# EAGLE board controller01_sliderboard (EAGLE 9.6.2)
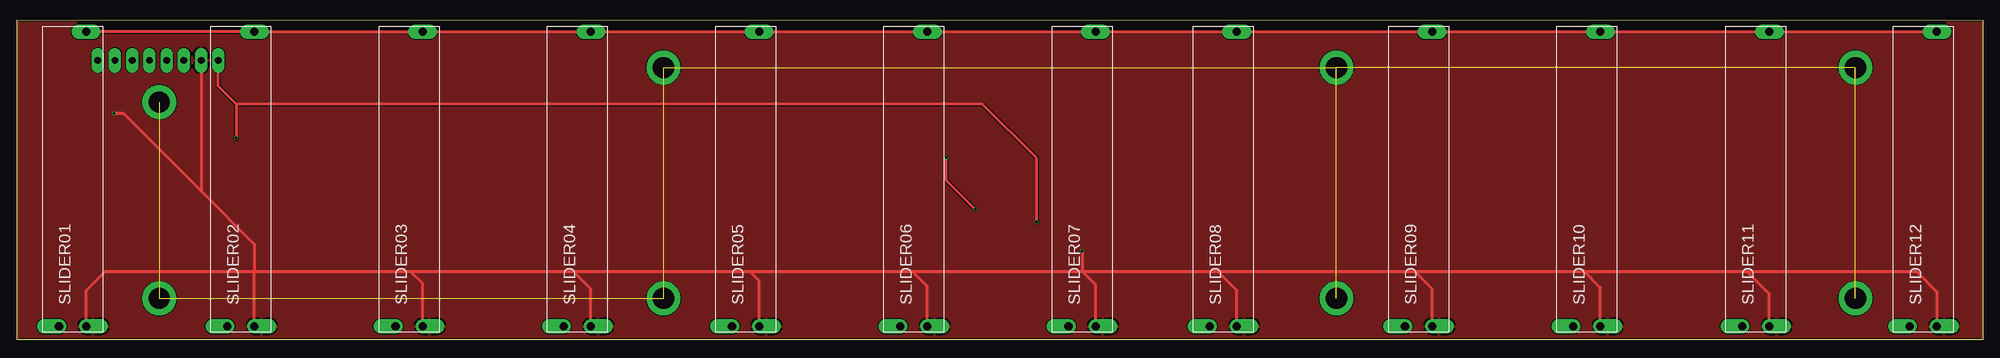
[diagram p0: board, top side]
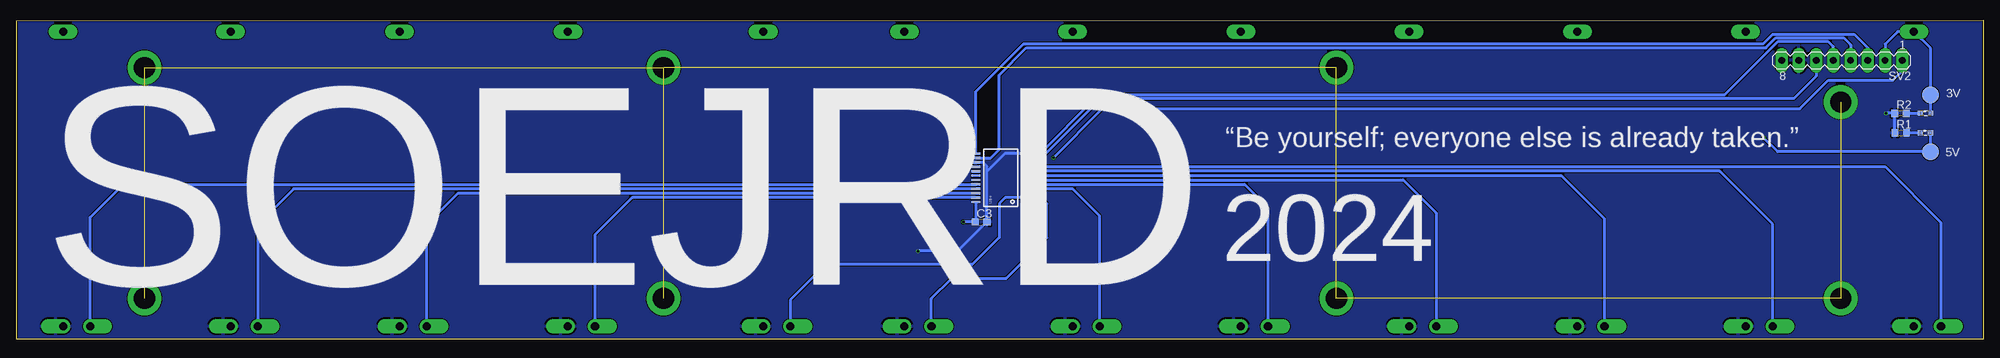
[diagram p1: board, bottom side, seen from below]

Size 289.8 x 47.1 mm. Coordinates in mm from the lower left corner, seen from the top.
Outline: 0,0 289.8,0 289.8,47 0,47.1 0,0
Copper layers (1*16): Top 0.035mm / dielectric 1.6mm / Bottom 0.035mm
Design rules "jlcpcb-2layers": minimum track width 5mil, minimum drill 0.3mm, track to track 5mil, track to pad 5mil, pad to pad 5mil, via to via 5mil, smd to smd 5mil, copper to edge 0.2mm, drill to drill 6mil, minimum pad ring 10mil, minimum via ring 3mil, stop-mask expansion 4mil, vias tented up to drill 0mil, thermal gap 10mil

## Footprints (pad centres in the part's own frame; a part is rotated, then mirrored left to right if it is on the bottom)
SML0603 = smd 0.8 x 0.8: A 0.75,0; C -0.75,0
C0603 = smd 1.1 x 1: 1 -0.85,0; 2 0.85,0
R0603 = smd 1 x 1.1: 1 -0.85,0; 2 0.85,0
SC-302N = drill 1.2 offset: P$1 0.8,-6.5; P$2 0.8,-2.5 | drill 1.2 long: P$3 44.3,-6.5
MA08-1 = drill 1.016 long: 1 -8.89,0; 2 -6.35,0; 3 -3.81,0; 4 -1.27,0; 5 1.27,0; 6 3.81,0; 7 6.35,0; 8 8.89,0
B2,54 = smd 2.54 x 2.54: TP 0,0
SSOP24 = smd 0.348 x 1.397: 1 -3.575,-3.656; 2 -2.925,-3.656; 3 -2.275,-3.656; 4 -1.625,-3.656; 5 -0.975,-3.656; 6 -0.325,-3.656; 7 0.325,-3.656; 8 0.975,-3.656; 9 1.625,-3.656; 10 2.275,-3.656; 11 2.925,-3.656; 12 3.575,-3.656; 13 3.575,3.656; 14 2.925,3.656; 15 2.275,3.656; 16 1.625,3.656; 17 0.975,3.656; 18 0.325,3.656; 19 -0.325,3.656; 20 -0.975,3.656; 21 -1.625,3.656; 22 -2.275,3.656; 23 -2.925,3.656; 24 -3.575,3.656

## Placement (x,y rotation side)
3V  [SML0603]  8.46,33.37 0 bottom
5V  [SML0603]  8.47,30.47 0 bottom
C3  100n  [C0603]  147.7,17.28 0 bottom
R1  1k  [R0603]  12.14,30.44 0 bottom
R2  1k  [R0603]  12.15,33.34 0 bottom
SLIDER01  SC-302N  [SC-302N]  3.7,1.1 90 top
SLIDER02  SC-302N  [SC-302N]  28.5,1.1 90 top
SLIDER03  SC-302N  [SC-302N]  53.3,1.1 90 top
SLIDER04  SC-302N  [SC-302N]  78.1,1.1 90 top
SLIDER05  SC-302N  [SC-302N]  102.9,1.1 90 top
SLIDER06  SC-302N  [SC-302N]  127.7,1.1 90 top
SLIDER07  SC-302N  [SC-302N]  152.5,1.1 90 top
SLIDER08  SC-302N  [SC-302N]  173.3,1.1 90 top
SLIDER09  SC-302N  [SC-302N]  202.1,1.1 90 top
SLIDER10  SC-302N  [SC-302N]  226.9,1.1 90 top
SLIDER11  SC-302N  [SC-302N]  251.8,1.1 90 top
SLIDER12  SC-302N  [SC-302N]  276.5,1.1 90 top
SV2  [MA08-1]  20.8,41.15 180 bottom
TP_5V  TPB2,54  [B2,54]  7.75,27.68 0 bottom
TV_3V3  TPB2,54  [B2,54]  7.73,36.08 0 bottom
U$4  MUX-74HC4067SMD  [SSOP24]  144.82,23.82 90 bottom

## Library data of the parts
3V 5V = led
C3 = rcl
R1 R2 = rcl; SPICEPREFIX: R
SLIDER01-SLIDER09 SLIDER10-SLIDER12 = Soejrd
SV2 = con-lstb; OC_FARNELL: unknown; OC_NEWARK: unknown
TP_5V TV_3V3 = testpad
U$4 = SparkFun-AnalogIC

## Nets
+3V3_A: 3V.A SLIDER01.P$3 SLIDER02.P$3 SLIDER03.P$3 SLIDER04.P$3 SLIDER05.P$3 SLIDER06.P$3 SLIDER07.P$3 SLIDER08.P$3 SLIDER09.P$3 SLIDER10.P$3 SLIDER11.P$3 SLIDER12.P$3 SV2.2 TV_3V3.TP
+5V: 5V.A C3.1 SV2.8 TP_5V.TP U$4.24
COM5: SV2.1 U$4.1
GND: C3.2 R1.1 R2.1 SLIDER01.P$1 SLIDER02.P$1 SLIDER03.P$1 SLIDER04.P$1 SLIDER05.P$1 SLIDER06.P$1 SLIDER07.P$1 SLIDER08.P$1 SLIDER09.P$1 SLIDER10.P$1 SLIDER11.P$1 SLIDER12.P$1 SV2.7 U$4.12 U$4.15
N$1: 5V.C R1.2
N$2: 3V.C R2.2
S0: SV2.6 U$4.10
S1: SV2.5 U$4.11
S2: SV2.4 U$4.14
S3: SV2.3 U$4.13
SLIDER01: SLIDER01.P$2 U$4.9
SLIDER02: SLIDER02.P$2 U$4.8
SLIDER03: SLIDER03.P$2 U$4.7
SLIDER04: SLIDER04.P$2 U$4.6
SLIDER05: SLIDER05.P$2 U$4.5
SLIDER06: SLIDER06.P$2 U$4.4
SLIDER07: SLIDER07.P$2 U$4.3
SLIDER08: SLIDER08.P$2 U$4.2
SLIDER09: SLIDER09.P$2 U$4.23
SLIDER10: SLIDER10.P$2 U$4.22
SLIDER11: SLIDER11.P$2 U$4.21
SLIDER12: SLIDER12.P$2 U$4.20

## Tracks (layer width: path | path; a pad name or v marks a point on that pad's centre or on a via)
+3V3_A
  Top 0.406: SLIDER12.P$3 SLIDER11.P$3 SLIDER10.P$3 SLIDER09.P$3 SLIDER08.P$3 SLIDER07.P$3 SLIDER06.P$3 SLIDER05.P$3 SLIDER04.P$3 SLIDER03.P$3 SLIDER02.P$3 SLIDER01.P$3
  Bottom 0.406: SV2.2 14.45,43.55 12.6,45.4 SLIDER01.P$3 7.73,42.93 TV_3V3.TP 7.71,36.06 3V.A
+5V  (via drill 0.35)
  Top 0.406: v150.3,17.3 150.3,26.7 142.3,34.7 32.3,34.7 | SV2.8 29.69,37.31 32.3,34.7 | 32.3,34.7 v32.3,29.7
  Bottom 0.406: U$4.24 148.48,17.35 C3.1 150.28,17.28 v150.3,17.3 | 5V.A 7.75,30.44 TP_5V.TP 30.28,27.68 v32.3,29.7
COM5  (via drill 0.35)
  Top 0.406: v141.2,19.2 137,23.4 v137,26.8
  Bottom 0.406: U$4.1 141.16,19.24 v141.2,19.2 | v137,26.8 129.8,34 27,34 22.8,38.2 13.3,38.2 11.91,39.59 SV2.1
GND  (via drill 0.35)
  Top 0.406: SV2.7 27.15,21.85 | 27.15,21.85 35,14 35,10 | SLIDER02.P$1 35,10 | SLIDER01.P$1 10.2,7.2 13,10 35,10 | 35,10 58,10 | 58,10 82,10 | 82,10 108,10 | 108,10 132,10 | 132,10 157,10 | 157,10 177,10 | 177,10 206,10 | 206,10 231,10 | 231,10 255,10 | 255,10 280,10 283,7 SLIDER12.P$1 | SLIDER11.P$1 258.3,6.7 255,10 | SLIDER10.P$1 233.4,7.6 231,10 | SLIDER09.P$1 208.6,7.4 206,10 | SLIDER08.P$1 179.8,7.2 177,10 | SLIDER07.P$1 159,8 157,10 | SLIDER06.P$1 134.2,7.8 132,10 | SLIDER05.P$1 109.4,8.6 108,10 | SLIDER04.P$1 84.6,7.4 82,10 | SLIDER03.P$1 59.8,8.2 58,10 | 27.15,21.85 15.66,33.34 v14.3,33.34 | v157,13 157,10
  Bottom 0.406: 146.85,24.75 C3.2 151.13,13 v157,13 | 146.85,24.75 146.85,25.55 147.4,26.09 U$4.15 | U$4.12 144.21,27.39 146.85,24.75 | R1.1 R2.1 v14.3,33.34
  pour Top: -15,48 7,70 31,70 284,70 308,46 308,6 280,-22 6,-22 -1,-15 -15,-1
  pour Bottom: -19,47 0,66 87,66 282,66 303,45 303,-5 301,-7 279,-29 218,-29 8,-29 -20,-1 -20,46
N$1
  Bottom 0.406: 5V.C 9.25,30.44 R1.2
N$2
  Bottom 0.406: R2.2 9.24,33.34 3V.C
N$3  (via drill 3.1 pad 5)  (7 unrouted)
  other vias: 271,6 271,40.1 194.5,40.1 194.5,6 95.3,6 95.3,40.1 21,35 21,6
S0
  Bottom 0.406: U$4.10 139.47,26.09 130.03,35.53 27.9,35.53 24.61,38.82 SV2.6
S1
  Bottom 0.406: U$4.11 141.15,26.76 139.66,26.76 130.35,36.07 38.1,36.07 30.23,43.93 22.83,43.93 22.07,43.17 SV2.5
S2
  Bottom 0.406: U$4.14 146.25,26.75 145,28 145,39 141,43 32,43 30.53,44.47 20.57,44.47 19.53,43.43 SV2.4
S3
  Bottom 0.406: U$4.13 148.48,36.52 141.4,43.6 32.4,43.6 31,45 19,45 16.99,42.99 SV2.3
SLIDER01
  Bottom 0.406: U$4.9 14.45,25.45 6.2,17.2 SLIDER01.P$2
SLIDER02
  Bottom 0.406: SLIDER02.P$2 31,17 38.81,24.81 140.95,24.81 140.96,24.8 U$4.8
SLIDER03
  Bottom 0.406: U$4.7 62.15,24.14 55.8,17.8 SLIDER03.P$2
SLIDER04
  Bottom 0.406: U$4.6 85.5,23.5 80.6,18.6 SLIDER04.P$2
SLIDER05
  Bottom 0.406: U$4.5 108.84,22.84 105.4,19.4 SLIDER05.P$2
SLIDER06
  Bottom 0.406: SLIDER06.P$2 130.2,18.2 134.19,22.2 U$4.4
SLIDER07
  Bottom 0.406: SLIDER07.P$2 155,6 152,9 144,9 138,15 138,20 139.54,21.55 U$4.3
SLIDER08
  Bottom 0.406: U$4.2 144.1,20.89 145,20 145,15 149,11 170.6,11 175.8,5.8 SLIDER08.P$2
SLIDER09
  Bottom 0.406: U$4.23 199.1,20.89 204.6,15.4 SLIDER09.P$2
SLIDER10
  Bottom 0.406: SLIDER10.P$2 229.4,16.9 224.75,21.55 U$4.22
SLIDER11
  Bottom 0.406: U$4.21 249,22.2 254.3,16.9 SLIDER11.P$2
SLIDER12
  Bottom 0.406: SLIDER12.P$2 279,18 274.15,22.84 U$4.20

## Text on the board
bPlace: “Be yourself; everyone else is already taken.” | 2024 | SOEJRD